# Altium PCB FRONT-UNIT.PcbDoc (part 1 of 2)
Units mm, origin at the board's own origin, x right, y up, seen from the top; angles counter-clockwise.
Board outline 187.14 x 77.14 mm, 2 copper layers (Top Layer, Top, Bottom Layer, Bottom); 94 components, 75 nets, 400 pads, 116 vias.
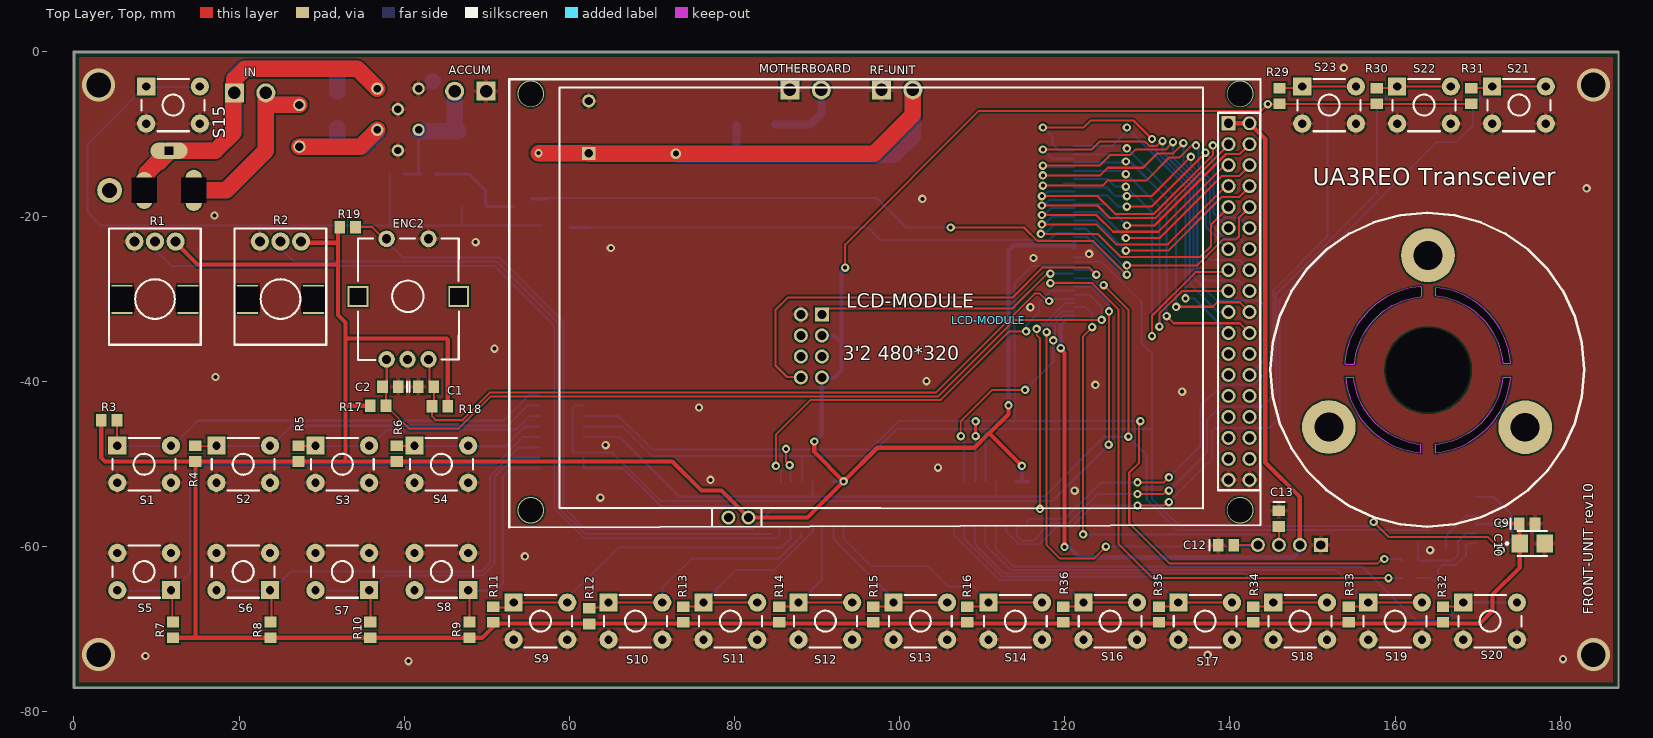
[diagram p0: Top Layer, Top view]
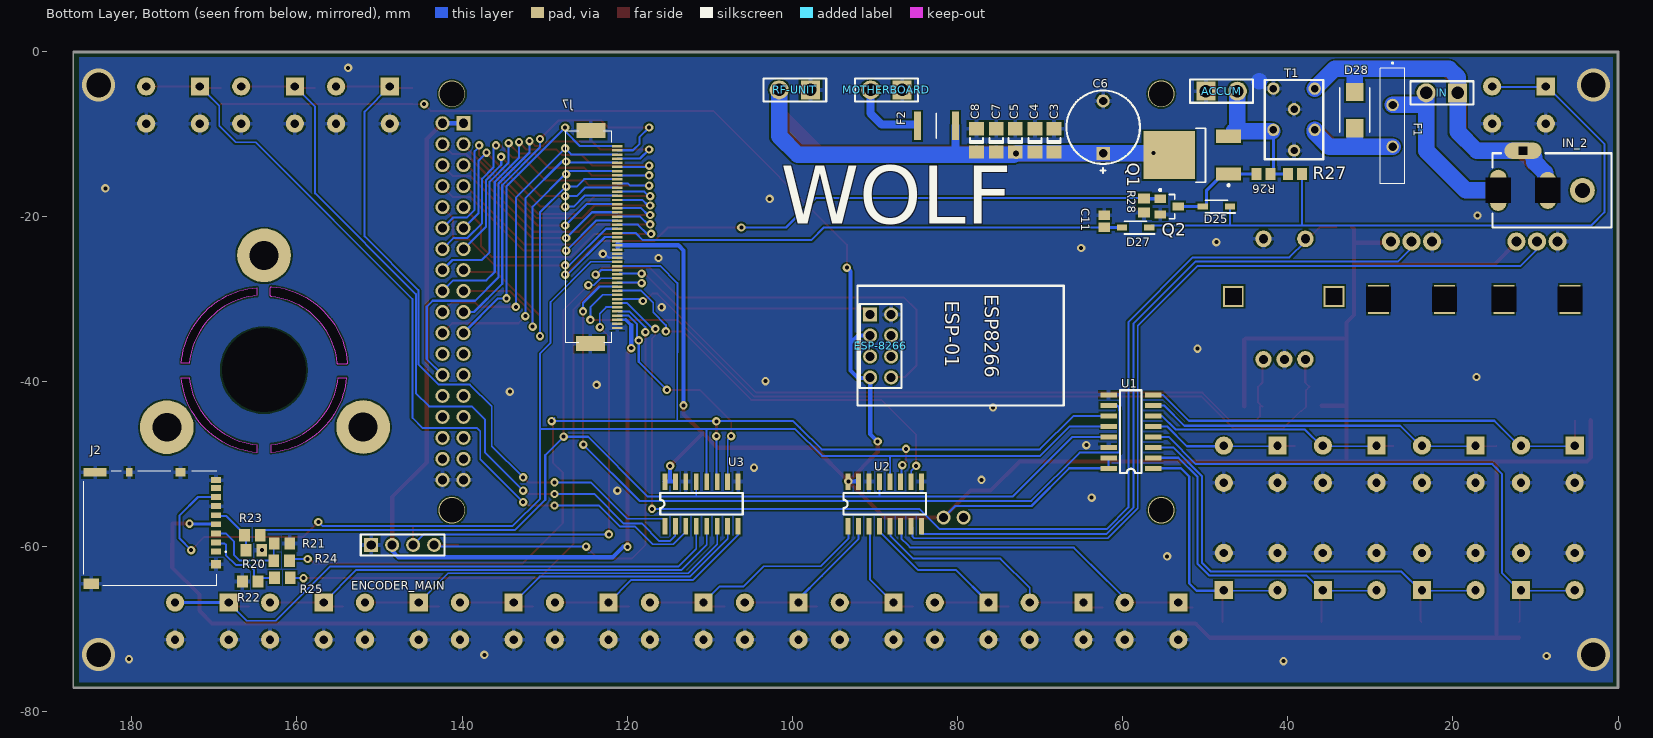
[diagram p1: Bottom Layer, Bottom view, seen from below]

## Layer stack, top to bottom
Top Solder, Top Mask: solder mask 0.0102, Solder Resist, Dk 3.5
Top Layer, Top: signal copper 0.0356
Dielectric 1: dielectric 0.32, FR-4, Dk 4.8
Bottom Layer, Bottom: signal copper 0.0356
Bottom Solder, Bot Mask: solder mask 0.0102, Solder Resist, Dk 3.5

## Board outline
-0.07,-77.07 ccw(c0,-77.07) 0,-77.141 ccw(c0,-77.07) 0.03,-77.134 ccw(c0,-77.07) 0.07,-77.07 0.07,-0.07 ccw(c0,-0.07) 0.03,-0.006 ccw(c0,-0.07) 0,0 187,0 cw(c187,-0.07) 187.07,-0.07 cw(c187,-0.07) 187.064,-0.1 cw(c187,-0.07) 187,-0.141 0,-0.141 cw(c0,-0.07) -0.064,-0.1 cw(c0,-0.07) -0.07,-0.07 cw(c0,-0.07) 0,0 0,-0.006 187,-0.006 cw(c187,-0.07) 187.064,-0.07 187.064,-77.07 ccw(c187,-77.07) 187,-77.006 0,-77.006 ccw(c0,-77.07) -0.064,-77.07 -0.064,-0.07 cw(c0,-0.07) 0,-0.006 cw(c0,-0.07) 0.064,-0.07 0.064,-77.07 cw(c0,-77.07) 0,-77.134 187,-77.134 ccw(c187,-77.07) 187.064,-77.07 187.07,-77.07 ccw(c187,-77.07) 187.064,-77.041 ccw(c187,-77.07) 187,-77 0,-77 ccw(c0,-77.07) -0.064,-77.041 ccw(c0,-77.07)
cut-out: 164.849,-29.564 cw(c164,-38.6) 173.034,-37.731 173.05,-37.75 174,-37.75 174.001,-37.752 ccw(c164,-38.6) 164.854,-28.6 164.85,-28.625
cut-out: 153.963,-37.844 ccw(c154.05,-37.75) 154.05,-37.878 154.975,-37.878 ccw(c154.975,-37.75) 155.102,-37.75 ccw(c154.975,-37.75) 155.102,-37.749 ccw(c154.977,-37.728) 155.104,-37.74 cw(c164,-38.6) 163.067,-29.711 ccw(c163.054,-29.584) 163.171,-29.634 ccw(c163.075,-29.55) 163.202,-29.55 163.202,-28.625 ccw(c163.075,-28.625) 163.131,-28.511 ccw(c163.054,-28.612) 163.042,-28.485 ccw(c164,-38.6) 153.879,-37.712 ccw(c154.005,-37.723)
cut-out: 154.004,-39.502 ccw(c164,-38.6) 163.094,-48.596 163.1,-48.575 163.1,-47.625 163.098,-47.616 cw(c164,-38.6) 154.985,-39.511 154.975,-39.5
cut-out: 164.864,-48.596 ccw(c164,-38.6) 173.993,-39.499 173.975,-39.5 173.025,-39.5 cw(c164,-38.6) 164.873,-47.628 164.85,-47.625

## Design rules (kind name [scope] priority, off if disabled: settings)
BoardOutlineClearance [All] p1: gap=0.2 ignorepadtopadclearanceinfootprint=FALSE except(0.4: Arc-SplitBarrior Arc-SplitContinuation Track-SplitBarrior Track-SplitContinuation SMDPad-SplitBarrior SMDPad-SplitContinuation THPad-SplitBarrior THPad-SplitContinuation Via-SplitBarrior Via-SplitContinuation Fill-SplitBarrior Fill-SplitContinuation Poly-SplitBarrior Poly-SplitContinuation Region-SplitBarrior Region-SplitContinuation Text-SplitBarrior Text-SplitContinuation)
Clearance "Clearance Bottom Layer" [OnLayer('Bottom Layer')] p1: gap=0.203 ignorepadtopadclearanceinfootprint=TRUE except(0.254: Arc-Text Track-Text SMDPad-Text THPad-Text Via-Text Fill-Text Poly-Text Region-Text Text-Text)
Clearance "Clearance Top Layer" [OnLayer('Top Layer')] p2: gap=0.203 ignorepadtopadclearanceinfootprint=TRUE except(0.254: Arc-Text Track-Text SMDPad-Text THPad-Text Via-Text Fill-Text Poly-Text Region-Text Text-Text)
Clearance [All] p3: gap=0.2 ignorepadtopadclearanceinfootprint=FALSE except(0.089: Arc-Arc Arc-Track Arc-SMDPad Track-Track Track-SMDPad SMDPad-SMDPad; 0.127: Arc-Via Track-Via SMDPad-Via THPad-Via Via-Via; 0.254: Arc-Text Track-Text SMDPad-Text THPad-Text Via-Text Fill-Text Poly-Text Region-Text Text-Text)
HoleSize [All] p1: absolutevalues=TRUE maxlimit=21 minlimit=0.486 maxpercent=80.000 minpercent=20.000
MinimumAnnularRing [All] p1: minimumring=0.076
MinimumSolderMaskSliver [All] p1: minsoldermaskwidth=0.01
PolygonConnect PolygonConnect_1 [All] p1: thpad.connectstyle=Relief thpad.reliefconductorwidth=0.508 thpad.reliefentries=4 thpad.polygonreliefangle="90 Angle" thpad.airgapwidth=0.254 smdpad.connectstyle=Relief smdpad.reliefconductorwidth=0.508 smdpad.reliefentries=4 smdpad.polygonreliefangle="90 Angle" smdpad.airgapwidth=0.254 via.connectstyle=Direct via.reliefconductorwidth=0.508 via.reliefentries=4 via.polygonreliefangle="90 Angle" via.airgapwidth=0.254
RoomDefinition FRONT-UNIT [InComponentClass('FRONT-UNIT')] p1: confinementstyle=ConfineIn formatcopy=TRUE lockcomponents=FALSE outline 0,-77.141 187,-77.141 187,-0.07 0,-0.07
RoutingCorners [All] p1: cornerstyle=Round minsetback=2.54 maxsetback=2.54
RoutingVias [All] p1: holewidth=0.5 width=1 viastyle="Through Hole" minholewidth=0.2 minwidth=0.45 maxholewidth=1 maxwidth=2
SilkToSilkClearance [All] p1: silktosilkclearance=0.01
SilkToSolderMaskClearance [IsPad] p1: minsilkscreentomaskgap=0.1 clearancetoexposedcopper=TRUE
SolderMaskExpansion [All] p1: expansion=0.102
Width [All] p1: maxlimit=2.54 minlimit=0.089 preferedwidth=0.381
25 further rules are at their usual default settings.

## Components (designator, comment, footprint, x,y, rotation, side; value= is the part's Value field where it differs from the comment)
ACCUM "JX2" JX2 48.006,-4.826 r180 bottom value=13.8V
C1 "100n" CAP_0805 42.431,-40.618 r0 top
C2 "100n" CAP_0805 38.531,-40.618 r180 top
C3 "1uF" CAP_1206 68.3,-10.77 r90 bottom
C4 "100n" CAP_1206 70.6,-10.77 r90 bottom
C5 "1n" CAP_1206 73,-10.77 r90 bottom
C6 "1000uF" CAP250RP 62.357,-9.722 r90 bottom
C7 "470pF" CAP_1206 75.3,-10.77 r90 bottom
C8 "120pF" CAP_1206 77.7,-10.77 r90 bottom
C9 "100n" CAP_0805 175.8,-57.2 r0 top
C10 "22uF" EEEFC_sizeB 176.2,-59.6 r0 top
C11 "8.2n" CAPC2013X94X50LL20T25 62.23,-20.574 r270 bottom
C12 "10n" CAP_0805 139.319,-59.817 r0 top
C13 "10n" CAP_0805 145.923,-56.388 r270 top
D25 "1n4148w" SOD3716X135N 48.641,-18.796 r0 bottom
D27 "1n4148w" SOD3716X135N 58.42,-21.336 r0 bottom
D28 "SM6T15A" SMBJ36CATR 31.877,-7.112 r90 bottom
ENC2 "PEC12" PEC12 40.5,-30 r180 top
ENCODER_MAIN "OPTICAL ENCODER" 644456-4 147.19,-59.135 r180 bottom
ESP-8266 "ESP-01 ESP8266" "ESP-01 ESP8266" 79.629,-35.63 r270 bottom
F1 "RUEF400" RUEF400 27.305,-9.017 r270 bottom
F2 "MF-MSMF110_16-2" FUSC4632X85N 82.55,-9.017 r0 bottom
IN "JX2" JX2 21.336,-5.023 r0 bottom value=13.8V
IN_2 "PJ-050B" PJ-050B 8.159,-16.184 r0 bottom value=13.8V
J2 "DM3AT-SF-PEJM5" DM3ATSFPEJM5 177.2,-57.8 r270 bottom
J7 "FPC-45P-0.5mm" FH12S45S05SH60 121.86,-22.5 r90 bottom
LCD-MODULE "ILI9481 480*320 3'2" LCD-MODULE-3.2-480-320 53.721,-3.37 r0 top
MOTHERBOARD "JX2" JX2 88.605,-4.67 r0 bottom value=13.8V
Q1 "IRFR9024NPBF" ONSC-DPAK-3-369C-01_V 51.562,-12.573 r0 bottom
Q2 "BSS123" FAIR-SOT23-3_V 54.356,-18.796 r270 bottom
R1 "ptv09a-4225f-b102" PTV09 9.8,-28.5 r180 top value="AF GAIN 1k"
R2 "ptv09a-4225f-b102" PTV09 25,-28.5 r180 top value="SHIFT 1k"
R3 "4.7k" RES_0805 4.25,-44.67 r180 top
R4 "4.7k" RES_0805 14.7,-48.72 r270 top
R5 "4.7k" RES_0805 27.2,-48.72 r270 top
R6 "4.7k" RES_0805 39.1,-48.72 r270 top
R7 "4.7k" RES_0805 12,-70.07 r270 top
R8 "4.7k" RES_0805 23.8,-70.07 r270 top
R9 "4.7k" RES_0805 47.9,-70.07 r270 top
R10 "4.7k" RES_0805 35.9,-70.07 r270 top
R11 "4.7k" RES_0805 50.8,-68.2 r270 top
R12 "4.7k" RES_0805 62.4,-68.4 r270 top
R13 "4.7k" RES_0805 73.8,-68.2 r270 top
R14 "4.7k" RES_0805 85.4,-68.2 r270 top
R15 "4.7k" RES_0805 96.8,-68.2 r270 top
R16 "4.7k" RES_0805 108.2,-68.2 r270 top
R17 "4.7k" RES_0805 36.831,-42.918 r180 top
R18 "4.7k" RES_0805 44.323,-42.996 r0 top
R19 "4.7k" RES_0805 33.147,-21.279 r180 top
R20 "3.3k" RES_0805 165.2,-60.4 r0 bottom
R21 "3.3k" RES_0805 161.8,-59.6 r0 bottom
R22 "3.3k" RES_0805 165.65,-64.2 r180 bottom
R23 "0" RES_0805 165.4,-58.6 r180 bottom
R24 "0" RES_0805 161.85,-61.67 r180 bottom
R25 "0" RES_0805 161.75,-63.77 r180 bottom
R26 "30k" RESC2013X60X40NL20T25 42.926,-14.859 r180 bottom
R27 "30k" RESC2013X60X40NL20T25 39.116,-14.859 r0 bottom
R28 "30k" RESC2013X60X40NL20T25 57.404,-18.669 r90 bottom
R29 "4.7k" RES_0805 146,-5.4 r270 top
R30 "4.7k" RES_0805 157.8,-5.4 r270 top
R31 "4.7k" RES_0805 169.2,-5.4 r270 top
R32 "4.7k" RES_0805 165.8,-68.2 r270 top
R33 "4.7k" RES_0805 154.4,-68.2 r270 top
R34 "4.7k" RES_0805 142.8,-68.2 r270 top
R35 "4.7k" RES_0805 131.4,-68.2 r270 top
R36 "4.7k" RES_0805 119.8,-68.2 r270 top
RF-UNIT "JX2" JX2 99.7,-4.67 r0 bottom value=13.8V
S1 "PTS645SK50LFS" PTS645SK50LFS 8.5,-50 r0 top
S2 "PTS645SK50LFS" PTS645SK50LFS 20.5,-50 r0 top
S3 "PTS645SK50LFS" PTS645SK50LFS 32.5,-50 r0 top
S4 "PTS645SK50LFS" PTS645SK50LFS 44.5,-50 r0 top
S5 "PTS645SK50LFS" PTS645SK50LFS 8.5,-63 r180 top
S6 "PTS645SK50LFS" PTS645SK50LFS 20.5,-63 r180 top
S7 "PTS645SK50LFS" PTS645SK50LFS 32.5,-63 r180 top
S8 "PTS645SK50LFS" PTS645SK50LFS 44.5,-63 r180 top
S9 "PTS645SK50LFS" PTS645SK50LFS 56.5,-69 r0 top
S10 "PTS645SK50LFS" PTS645SK50LFS 68,-69 r0 top
S11 "PTS645SK50LFS" PTS645SK50LFS 79.5,-69 r0 top
S12 "PTS645SK50LFS" PTS645SK50LFS 91,-69 r0 top
S13 "PTS645SK50LFS" PTS645SK50LFS 102.5,-69 r0 top
S14 "PTS645SK50LFS" PTS645SK50LFS 114,-69 r0 top
S15 "PTS645SK50LFS" PTS645SK50LFS 12,-6.5 r0 top value=PWR
S16 "PTS645SK50LFS" PTS645SK50LFS 125.5,-69 r0 top
S17 "PTS645SK50LFS" PTS645SK50LFS 137,-69 r0 top
S18 "PTS645SK50LFS" PTS645SK50LFS 148.5,-69 r0 top
S19 "PTS645SK50LFS" PTS645SK50LFS 160,-69 r0 top
S20 "PTS645SK50LFS" PTS645SK50LFS 171.5,-69 r0 top
S21 "PTS645SK50LFS" PTS645SK50LFS 175,-6.5 r0 top
S22 "PTS645SK50LFS" PTS645SK50LFS 163.5,-6.5 r0 top
S23 "PTS645SK50LFS" PTS645SK50LFS 152,-6.5 r0 top
T1 "BNX016-01" TRANSF_ICORE 39.243,-8.255 r270 bottom
U1 "MCP3008-I/SL" MCP3008-I/SL 59,-46.044 r0 bottom
U2 "MCP3008-I/SL" MCP3008-I/SL 88.8,-54.8 r90 bottom
U3 "MCP3008-I/SL" MCP3008-I/SL 111,-54.8 r90 bottom

## Footprints (in the part's own frame and the unit in brackets; to place one, negate y for a bottom-side part, rotate by r counter-clockwise, add the part's x,y. Pads: shape width x height; smd on the part's side, far side on the other; paste and mask are expansions set on the pad)
644456-4 [mm]
  rect 1.7x1.7 hole 1.1: 1(-3.81,-0.635)
  round 1.7 hole 1.1: 2(-1.27,-0.635) 3(1.27,-0.635) 4(3.81,-0.635)
  silkscreen extent -5.08,-1.9 5.08,0.64
CAP250RP [mm]
  rect 1.6x1.6 hole 1: 1(-2.631,0)
  round 1.6 hole 1: 2(3.719,0)
  silkscreen extent -4.99,-4.45 4.99,4.45
CAP_0805 [mm]
  rect 1.3x1.5 smd: 1(-0.75,0) 2(1.15,0)
  silkscreen extent -1.8,-0.65 -1.8,0.65
CAP_1206 [mm]
  rect 1.6x1.8 smd: 1(-1.4,0) 2(1.4,0)
  silkscreen extent -0.3,-0.8 0.3,0.8
CAPC2013X94X50LL20T25 [mm] "Chip Capacitor, 2-Leads, Body 2.01x1.25mm, IPC High Density"
  rect 1.15x1.35 smd: 1(-0.725,0) 2(0.725,0)
  body extent -1.1,-0.72 1.1,0.72, height 0.94
DM3ATSFPEJM5 [mm]
  rect 0.7x1.2 smd: 1(2.775,7.412) 2(1.675,7.412) 3(0.575,7.412) 4(-0.525,7.412) 5(-1.625,7.412) 6(-2.725,7.412) 7(-3.825,7.412) 8(-4.925,7.412) MP2(-5.875,7.412)
  rect 1x1.2 smd: MP1(4.325,7.412) MP3(-6.825,3.112)
  rect 1x0.8 smd: MP4(-6.825,-3.087)
  rect 1x2.8 smd: MP5(-6.825,-7.237)
  rect 1.3x1.9 smd: MP6(6.675,-7.688)
  silkscreen extent -6.93,-8.64 6.93,8.64, body extent -7.24,-8.64 7.2,7.94, height 1.93
EEEFC_sizeB [mm]
  rect 2x2.2 smd: 1(-1.1,0) 2(1.9,0)
  silkscreen extent -2.9,-1.5 2.2,1.5
"ESP-01 ESP8266" [mm]
  round 1.7 hole 1.1: 1(-3.76,-8.4) 2(-1.22,-8.4) 3(1.32,-8.4) 4(3.86,-8.4) 6(-1.22,-10.94) 7(1.32,-10.94) 8(3.86,-10.94)
  rect 1.7x1.7 hole 1.1: 5(-3.76,-10.94)
  silkscreen extent -7.25,-12.5 7.25,12.5
FAIR-SOT23-3_V [mm] "SOT23, 3-Leads, Body 2.92x1.3mm, Pitch 0.95mm"
  rect 1x1.4 smd: 1(-0.95,-1.1) 2(0.95,-1.1) 3(0,1.1)
  silkscreen extent -2.12,-1.23 1.46,0.65, body extent -1.46,-0.65 1.46,0.65, height 1.2
FH12S45S05SH60 [mm]
  rect 0.3x1.3 smd: 1(11,-0.65) 2(10.5,-0.65) 3(10,-0.65) 4(9.5,-0.65) 5(9,-0.65) 6(8.5,-0.65) 7(8,-0.65) 8(7.5,-0.65) 9(7,-0.65) 10(6.5,-0.65) 11(6,-0.65) 12(5.5,-0.65) 13(5,-0.65) 14(4.5,-0.65) 15(4,-0.65) 16(3.5,-0.65) 17(3,-0.65) 18(2.5,-0.65) 19(2,-0.65) 20(1.5,-0.65) 21(1,-0.65) 22(0.5,-0.65) 23(0,-0.65) 24(-0.5,-0.65) 25(-1,-0.65) 26(-1.5,-0.65) 27(-2,-0.65) 28(-2.5,-0.65) 29(-3,-0.65) 30(-3.5,-0.65) 31(-4,-0.65) 32(-4.5,-0.65) 33(-5,-0.65) 34(-5.5,-0.65) 35(-6,-0.65) 36(-6.5,-0.65) 37(-7,-0.65) 38(-7.5,-0.65) 39(-8,-0.65) 40(-8.5,-0.65) 41(-9,-0.65) 42(-9.5,-0.65) 43(-10,-0.65) 44(-10.5,-0.65) 45(-11,-0.65)
  rect 1.8x3.5 smd: 46(-12.9,2.6) 47(12.9,2.54)
  silkscreen extent -12.8,0 12.8,5.6, body extent -13.62,-5.6 13.62,1.27, height 2.1
FUSC4632X85N [mm]
  rect 0.85x3.43 smd: 1(-2.3,0) 2(2.3,0)
  silkscreen extent 0,-1.52 0,1.52, body extent -2.27,-1.62 2.27,1.62, height 0.85
JX2 [mm]
  rect 2.3x2.3 hole 1.5: 1(-1.905,0)
  round 2.3 hole 1.5: 2(1.905,0)
  silkscreen extent -3.81,-1.4 3.81,1.4
LCD-MODULE-3.2-480-320 [mm]
  rect 1.7x1.7 hole 1.1: 1(86.106,-5.334)
  round 1.7 hole 1.1: 2(88.646,-5.334) 3(86.106,-7.874) 4(88.646,-7.874) 5(86.106,-10.414) 6(88.646,-10.414) 7(86.106,-12.954) 8(88.646,-12.954) 9(86.106,-15.494) 10(88.646,-15.494) 11(86.106,-18.034) 12(88.646,-18.034) 13(86.106,-20.574) 14(88.646,-20.574) 15(86.106,-23.114) 16(88.646,-23.114) 17(86.106,-25.654) 18(88.646,-25.654) 19(86.106,-28.194) 20(88.646,-28.194) 21(86.106,-30.734) 22(88.646,-30.734) 23(86.106,-33.274) 24(88.646,-33.274) 25(86.106,-35.814) 26(88.646,-35.814) 27(86.106,-38.354) 28(88.646,-38.354) 29(86.106,-40.894) 30(88.646,-40.894) 31(86.106,-43.434) 32(88.646,-43.434) 33(86.106,-45.974) 34(88.646,-45.974) 35(86.106,-48.514) 36(88.646,-48.514) 37(25.54,-53.086) 38(27.956,-53.086)
  silkscreen extent -1,-54.3 90,0
MCP3008-I/SL [mm]
  rect 2x0.6 smd: 1(-2.7,4.445) 2(-2.7,3.175) 3(-2.7,1.905) 4(-2.7,0.635) 5(-2.7,-0.635) 6(-2.7,-1.905) 7(-2.7,-3.175) 8(-2.7,-4.445) 9(2.7,-4.445) 10(2.7,-3.175) 11(2.7,-1.905) 12(2.7,-0.635) 13(2.7,0.635) 14(2.7,1.905) 15(2.7,3.175) 16(2.7,4.445)
  silkscreen extent -1.3,-5 1.3,5
ONSC-DPAK-3-369C-01_V [mm] "DPAK, 3-Leads, Body 6.54x6.095mm, Pitch 2.29mm"
  rect 3x1.6 smd: 1(-4.4,2.29) 3(-4.4,-2.29)
  rect 6.2x5.8 smd: 4(2.8,0)
  silkscreen extent -4.52,-3.27 -0.45,3.76, body extent -1.6,-3.27 4.49,3.27, height 2.38
PEC12 [mm]
  round 2 hole 1.1: 1(-2.44,-7.302) 2(2.64,-7.302) 3(2.64,7.302) 4(0.1,7.302) 5(-2.44,7.302)
  rect 2.5x2.5 hole 2 square: 6(-6.1,-0.318) 7(6.1,-0.317)
  silkscreen extent -6.12,-7.32 6.12,7.38
PJ-050B [mm]
  oval 2x5 hole 3 square: 1(6.35,0.65)
  oval 2x4.5 hole 3 square: 2(0.35,0.65)
  oval 4.5x2 hole 1 square: 3(3.35,-4.15)
  round 3 hole 1.8: 4(-3.85,0.65)
  silkscreen extent -7.35,-3.85 7.05,5.15
PTS645SK50LFS [mm]
  rect 2.2x2.2 hole 1: 1(-3.25,2.25)
  round 2.2 hole 1: 2(3.25,2.25) 3(3.25,-2.25) 4(-3.25,-2.25)
  silkscreen extent -3.81,-3.17 3.81,3.18
PTV09 [mm]
  round 2.2 hole 1.2: 1(-2.515,-5.465) 2(-0.015,-5.465) 3(2.485,-5.465)
  rect 2.5x3.5 hole 3 square: 4(-4.015,1.535) 5(3.985,1.535)
  silkscreen extent -5.56,-7.03 5.56,7.03
RES_0805 [mm]
  rect 1.3x1.5 smd: 1(-0.95,0) 2(0.95,0)
RESC2013X60X40NL20T25 [mm] "Chip Resistor, 2-Leads, Body 2.00x1.25mm, IPC Medium Density"
  rect 1.2x1.45 smd: 1(-0.85,0) 2(0.85,0)
  body extent -1.1,-0.72 1.1,0.72, height 0.6
RUEF400 [mm]
  round 1.515 hole 1.01: 1(-2.525,0) 2(2.525,0)
  silkscreen extent -7.7,-1.5 7,1.5, body extent -7,-1.5 7,1.5, height 19.1
SMBJ36CATR [mm]
  rect 2.2x2.15 smd: 1(-2.2,0) 2(2.2,0)
  silkscreen extent -2.68,-1.81 2.68,1.81, body extent -3.09,-1.81 3.09,1.81, height 2.75
SOD3716X135N [mm]
  rect 1.25x0.75 smd: 1(-1.65,0) 2(1.65,0)
  silkscreen extent -2.27,-0.77 1.35,0.77, body extent -1.85,-0.78 1.85,0.77, height 1.35
TRANSF_ICORE [mm]
  round 1.5 hole 0.9: LCG1(-1.25,0.01) LCG2(3.75,0.01) LCG3(-3.75,-2.49) LCP(1.25,-2.49) P(1.25,2.51) PSG(-3.75,2.51)
  silkscreen extent -4.81,-3.54 4.81,3.54

## Part data
C1 C2 C9 C12 C13: library part CAP_0805, "CAP_0805"
C3 C4 C5 C7 C8: library part CAP_1206, "CAP_1206"
C6: library part CAP250RP, "CAP250RP"
C10: library part EEEFC_sizeB, "EEEFC_sizeB"
C11: library part CMP-2007-04444-1, "CAP_1206", Manufacturer="AVX Interconnect / Elco", Part Number=08055C822KAT2A
D25 D27: "Diode", Manufacturer_Name=Vishay, Datasheet Link=http://www.vishay.com/docs/85748/1n4148w.pdf, Height=1.35mm, Manufacturer_Part_Number=1n4148w
D28: "Diode", Manufacturer_Name=STMicroelectronics, Mouser Part Number=511-SM6T15A, RS Part Number=4864915P, Allied_Number=70390432, Allied Price/Stock=http://www.alliedelec.com/stmicroelectronics-sm6t15a/70390432/, Datasheet Link=http://www.st.com/web/en/resource/technical/document/datasheet/CD00000725.pdf, Height=2.65mm, Manufacturer_Part_Number=SM6T15A, Mouser Price/Stock=https://www.mouser.com/Search/Refine.aspx?Keyword=511-SM6T15A, RS Price/Stock=http://uk.rs-online.com/web/p/products/4864915P
ENCODER_MAIN: library part 644456-4
F1: "Fuse", Manufacturer_Name=LITTELFUSE, Mouser Part Number=650-RUEF400, RS Part Number=5176837P, Datasheet Link=https://componentsearchengine.com/Datasheets/1/RUEF400.pdf, Height=19mm, Manufacturer_Part_Number=RUEF400, Mouser Price/Stock=https://www.mouser.co.uk/ProductDetail/Littelfuse/RUEF400?qs=hv6pn79dJPQHuFVnpNF%2FDg%3D%3D, RS Price/Stock=http://uk.rs-online.com/web/p/products/5176837P
F2: "Fuse", Manufacturer_Name=Bourns, Manufacturer_Part_Number=MF-MSMF110/16-2, Mouser Part Number=652-MF-MSMF110/16-2, RS Part Number=6478207P, Allied_Number=70153434, Allied Price/Stock=https://www.alliedelec.com/bourns-mf-msmf110-16-2/70153434/, Datasheet Link=https://componentsearchengine.com/Datasheets/2/MF-MSMF110_16-2.pdf, Height=0.85mm, Mouser Price/Stock=https://www.mouser.co.uk/ProductDetail/Bourns/MF-MSMF110-16-2?qs=wksszfECgvir54ST3ixUHA%3D%3D, RS Price/Stock=http://uk.rs-online.com/web/p/products/6478207P
J2: "Connector", Manufacturer_Name=HRS(Hirose), Datasheet Link=https://datasheet.lcsc.com/szlcsc/Hirose-HRS-DM3AT-SF-PEJM5_C114218.pdf, Height=1.83mm, Manufacturer_Part_Number=DM3AT-SF-PEJM5
J7: library part FH12S-45S-0.5SH_55_, "Connector", Manufacturer_Name=Hirose, Manufacturer_Part_Number=FH12S-45S-0.5SH(55), Mouser Part Number=798-FH12S-45S-05SH55, RS Part Number=1620942, Datasheet Link=https://www.hirose.com/product/en/download_file/key_name/FH12S-45S-0.5SH%2855%29/category/Drawing%20(2D)/doc_file_id/43881/?file_category_id=6&item_id=05860665055&is_series=, Height=2mm, Mouser Price/Stock=https://www.mouser.co.uk/ProductDetail/Hirose-Connector/FH12S-45S-05SH55?qs=0N%252BVULUZFj%252BE0LA99Ny0NA%3D%3D, RS Price/Stock=http://uk.rs-online.com/web/p/products/1620942
LCD-MODULE: library part LCD-MODULE_3'2_480х320, "LCD-MODULE_3'2_480х320"
Q1: library part CMP-1058-00387-1, "IRFR9024NPBF, Транзистор, Р-канал 55В 11А", Manufacturer="On Semiconductor", Package Type="DPAK-3, IPAK-4", PartNumber=NTD2955G, Channel Polarity="P Channel", Ciss Typ (pF)=500, ComponentLink1Description="Manufacturer URL", ComponentLink1URL=http://www.onsemi.com/, ComponentLink2Description=Datasheet, ComponentLink2URL=http://www.onsemi.cn/pub_link/Collateral/NTD2955-D.PDF, ComponentLink3Description="Package Specification", ComponentLink3URL=http://www.onsemi.cn/pub_link/Collateral/369C.PDF, Configuration=Single, Coss Typ (pF)=150, Crss Typ (pF)=50, DatasheetVersion="Rev. 13", ID Max (A)=12, Mounting Technology="Surface Mount", PackageDescription="3-Pin Flange Mount, Body 6.54 x 6.095 mm, Pitch 2.29 mm", PackageReference=DPAK-3-369C-01, PackageVersion="Rev. E, 02/2014", Packing="Tape and Reel", PD Max (W)=55, Qrr Typ (nC)=100, RoHS=Pb-Free, V(BR)DSS Min (V)=60, VGS(th) Max (V)=4, VGS Max (V)=20
Q2: library part CMP-2000-04934-1, "N-Channel Logic Level Enhancement Mode Field Effect Transistor, 1.7 V, -55 to 150 degC, 3-Pin SOT-23, RoHS, Tape and Reel", Manufacturer=Fairchild, Maximum Continuous Drain Current=0.17A, Maximum Drain Source Voltage=100V, Maximum Gate Source Voltage=±20V, Operating Temperature=-55to150degC, Package=3SOT-23, Package Description="3-Pin Small Outline Transistor, Body 2.92 x 1.325 mm, Pitch 0.95 mm", Package Reference=SOT23-3, Package Version="Rev. 12, 03/2016", Category=MOSFET, Channel Mode=Enhancement, Channel Type=N, Datasheet URL=https://www.fairchildsemi.com/datasheets/BS/BSS123.pdf, Datasheet Version=Jun-03, Manufacturer URL=https://www.fairchildsemi.com/, Mounting=SurfaceMount, Package URL=http://www.fairchildsemi.com/dwg/MA/MA03D.pdf, Packaging=Tape&Reel, Rad Hard=No, RDS-on=6000@10VmOhm, Typical Fall Time=2.4ns, Typical Rise Time=9ns, Typical Turn-Off Delay Time=17ns, Typical Turn-On Delay Time=1.7ns
R1 R2: library part PTV09, "Adjustable Resistor PTV09"
R3 R4 R5 R6 R7 R8 R9 R10 R11 R12 R13 R14 R15 R16 R17 R18 R19 R20 R21 R22 R23 R24 R25 R29 R30 R31 R32 R33 R34 R35 R36: library part RES_0805, "RES_0805"
R26 R27 R28: library part CMP-2001-00626-1, "RES_0805", Manufacturer=Panasonic, Part Number=ERA-6AEB303V
S1: LCSC Part #=test
T1: library part TRANSF_ICORE
ENC2: FULLNAME="Выключатель замыкающий с приводом нажатием кнопки"

## Free pads (board coordinates)
  round 6.5 hole 3.5: 2(151.975,-45.5) 2(163.975,-24.7) 2(175.75,-45.525)
  round 0.1 hole 10.2: 4(164,-38.6)

## Via types
v1: diameter 1.016, hole 0.486, Top Layer, Top to Bottom Layer, Bottom, tented both sides, 107 vias
v2: diameter 3.2, hole 3, Top Layer, Top to Bottom Layer, Bottom, 4 vias
v3: diameter 4, hole 3, Top Layer, Top to Bottom Layer, Bottom, 4 vias
v4: diameter 1.27, hole 0.711, Top Layer, Top to Bottom Layer, Bottom, tented both sides, 1 vias

## Nets (pads, with @x,y where several pads share a name; then routed paths per layer and width w, separated by ;. In a path a pad name is that pad's centre, name@x,y a point inside that pad or via, vN(x,y) a via of type N, cw(c..) or ccw(c..) an arc to the next point about the centre after c; other vN are vias at no path point)
+3V3: C9.1 C10.1 ESP-8266.6 ESP-8266.8 J2.4 J7.24 J7.25 J7.26 LCD-MODULE.38 R1.1 R2.1 R3.2 R4.2 R5.2 R6.2 R7.2 R8.2 R9.2 R10.2 R11.2 R12.2 R13.2 R14.2 R15.2 R16.2 R17.2 R18.2 R19.2 R29.2 R30.2 R31.2 R32.2 R33.2 R34.2 R35.2 R36.2 U1.15 U1.16 U2.15 U2.16 U3.15 U3.16 | length 580.6
  Top Layer, Top w0.23: v1(93.4,-26.2) 93.4,-23.4 109.6,-7.2 143.8,-7.2 v1(144.6,-6.4) 145.95,-6.4 R29.2 R30.2 R31.2
  Top Layer, Top w0.5: R3.2 3.3,-49.21 3.76,-49.67 R4.2 ; R7.2 14.7,-71.02 R4.2 ; R1.1@12.281,-23.118 14.986,-25.823 31.973,-25.823 32,-25.796 ; 14.721,-71.02 R8.2 R10.2 R9.2 49.4,-71.02 51.15,-69.27 170.27,-69.27 171.8,-67.741 171.8,-65.8 175.1,-62.5 C10.1 175.05,-59.55 C9.1 v1(173,-57.2) ; R2.1@27.1,-23.184 32,-23.184 ; R19.2 32,-21.476 32,-23.184 ; 32.905,-49.665 32.905,-42.918 ; R17.2 32.906,-42.918 ; R18.2 45.273,-34.927 45.124,-34.778 32.893,-34.778 ; v1(89.662,-47.244) 89.662,-48.514 v1(93.218,-52.07) ; v1(113.173,-42.868) 113.173,-43.947 110.895,-46.226 110.826,-46.226 ; v1(114.8,-50.2) 110.826,-46.226 ; R4.2 R5.2 R6.2 72.46,-49.67 75.99,-53.2 78.421,-53.2 LCD-MODULE.38 88.832,-56.456 v1(93.218,-52.07) ; 32,-25.796 32,-23.184 ; 32,-25.796 32,-31.943 32.893,-32.836 32.893,-34.778 ; 32.893,-34.778 32.893,-40.33 32.905,-40.33 32.905,-42.918 ; v1(93.218,-52.07) 97.288,-48 109.052,-48 110.826,-46.226
  Bottom Layer, Bottom w0.254: U1.15 U1.16 66.464,-50.489 71.04,-55.066 80.287,-55.066 LCD-MODULE.38
  Bottom Layer, Bottom w0.381: J2.4 169.84,-57.223 172.977,-57.223 v1(173,-57.2)
  Bottom Layer, Bottom w0.5: v1(89.662,-47.244) 90.569,-46.337 90.569,-39.803 90.805,-39.567 92.046,-39.567 92.964,-38.65 92.964,-35.328 ; ESP-8266.6@90.805,-34.41 92.046,-34.41 92.964,-35.328 ; U2.15@91.975,-52.037 92.329,-52.037 92.362,-52.07 v1(93.218,-52.07) ; v1(93.4,-26.2) 92.964,-26.636 92.964,-35.328 ; v1(113.173,-42.868) 113.173,-24.114 113.808,-23.479 J7.25@121.143,-23.479 ; U3.15 114.81,-52.1 ; v1(114.8,-50.2) 114.8,-52.09 114.81,-52.1 ; U3.16 114.81,-52.1 ; 121.143,-23.749 J7.25@121.143,-23.479 ; 121.143,-23.241 J7.25@121.143,-23.479
+5: ENCODER_MAIN.2 J7.43 LCD-MODULE.1 LCD-MODULE.2 | length 117.7
  Top Layer, Top w0.5: v1(119.507,-35.941) 119.507,-36.081 119.965,-36.539 v1(119.965,-60) ; LCD-MODULE.1 LCD-MODULE.2@142.299,-8.704 ; LCD-MODULE.2@142.24,-8.646 LCD-MODULE.2@142.299,-8.704 ; LCD-MODULE.2@142.333,-8.739 LCD-MODULE.2@142.299,-8.704 ; LCD-MODULE.2 LCD-MODULE.2@142.299,-8.704 ; LCD-MODULE.2@142.46,-8.797 144.272,-10.609 144.272,-49.784 148.46,-53.972 ENCODER_MAIN.2
  Bottom Layer, Bottom w0.3: 120.164,-32.49 J7.43@121.132,-32.49
  Bottom Layer, Bottom w0.4: 119.507,-33.147 120.164,-32.49
  Bottom Layer, Bottom w0.5: v1(119.507,-35.941) 119.507,-33.147 ; v1(119.965,-60) 120.509,-60 121.779,-61.27 147.7,-61.27 148.5,-60.47 148.5,-60.431 148.46,-60.391 ENCODER_MAIN.2 ; LCD-MODULE.1 LCD-MODULE.2
+12: C3.1 C4.1 C5.1 C6.1 C7.1 C8.1 F2.1 Q1.4 RF-UNIT.2 | length 107.2
  Top Layer, Top w2: v1(56.261,-12.319) 62.322,-12.319 C6.1 62.374,-12.37 v4(72.9,-12.37) 96.92,-12.37 101.605,-7.685 RF-UNIT.2
  Bottom Layer, Bottom w0.254: C5.1@72.817,-12.354 C5.1
  Bottom Layer, Bottom w0.381: 80.137,-12.52 80.25,-12.407 ; 85.965,-12.135 86.35,-12.52
  Bottom Layer, Bottom w1: 80.25,-12.407 F2.1
  Bottom Layer, Bottom w1.6: C7.1@75.3,-12.52 C7.1 ; C8.1 C8.1@77.807,-12.52
  Bottom Layer, Bottom w2: v1(56.261,-12.319) 62.322,-12.319 C6.1 68.3,-12.354 70.6,-12.354 C5.1@72.817,-12.354 ; v4(72.9,-12.37) 73.188,-12.52 75.3,-12.52 77.807,-12.52 80.137,-12.52 86.35,-12.52 99.35,-12.52 101.605,-10.265 RF-UNIT.2
AD1_CS: J7.35 U1.10 | length 99.2
  Top Layer, Top w0.254: v1(125.308,-47.625) 125.329,-47.605 125.329,-31.516 v1(125.349,-31.496)
  Bottom Layer, Bottom w0.254: U1.10 60.673,-42.869 60.444,-43.098 60.444,-43.484 60.368,-43.56 60.368,-48.589 65.205,-48.589 71.047,-54.431 118.502,-54.431 v1(125.308,-47.625) ; J7.35@121.143,-28.479 122.443,-28.479 123.348,-28.479 125.349,-30.48 v1(125.349,-31.496)
AD2_CS: J7.36 U2.10 | length 50.8
  Top Layer, Top w0.23: v1(85.001,-50.2) 85.001,-46.444 89.245,-42.2 105,-42.2 113.291,-33.909 v1(115.316,-33.909)
  Bottom Layer, Bottom w0.23: v1@84.709,-50.292 84.801,-50.2 v1(85.001,-50.2) 85.604,-50.803 85.604,-52.079 U2.10 ; v1(115.316,-33.909) 115.316,-33.147 116.84,-31.623 116.84,-30.435 118.296,-28.979 J7.36@121.143,-28.979
AD3_CS: J7.42 U3.10 | length 29.1
  Top Layer, Top w0.23: v1(107.4,-46.6) 107.4,-44.8 111.2,-41 v1(115.2,-41)
  Bottom Layer, Bottom w0.23: v1(107.4,-46.6) 107.825,-47.025 U3.10
  Bottom Layer, Bottom w0.254: v1(115.2,-41) 118.6,-37.6 v1(118.6,-35) 118.8,-34.8 118.8,-33.042 119.863,-31.979 J7.42@121.143,-31.979
CLK: J7.33 R23.2 U1.13 U2.13 U3.13 | length 143.5
  Top Layer, Top w0.254: v1(124.714,-28.321) 127.696,-31.303 v1(127.696,-46.67)
  Bottom Layer, Bottom w0.23: 73.298,-53.915 88.519,-53.915 89.4,-53.915 ; U2.13 89.435,-53.88 89.4,-53.915 ; U3.13 111.635,-53.88 111.6,-53.915 ; J7.33@121.143,-27.479 123.192,-27.479 124.034,-28.321 v1(124.714,-28.321) ; 124.73,-46.67 117.485,-53.915 111.6,-53.915 ; 89.4,-53.915 111.6,-53.915
  Bottom Layer, Bottom w0.254: U1.13 66.062,-46.679 73.298,-53.915 ; 124.73,-46.67 v1(127.696,-46.67) 129.921,-48.895 129.921,-54.299 133.604,-57.982 R23.2@164.2,-57.982
CPU_PW_HOLD: J7.23 Q2.1 R28.2 | length 84.2
  Top Layer, Top w0.254: v1(106.172,-21.336) 115.062,-21.336 116.713,-22.987 123.444,-22.987 v1(127.508,-27.051)
  Bottom Layer, Bottom w0.254: R28.2@57.404,-17.762 97.194,-17.762 100.768,-21.336 v1(106.172,-21.336) ; J7.23@121.143,-22.479 122.682,-22.479 127.254,-27.051 v1(127.508,-27.051)
  Bottom Layer, Bottom w0.381: Q2.1 57.377,-17.846 R28.2
CPU_PW_ON: C11.2 D27.2 J7.22 | length 62.1
  Bottom Layer, Bottom w0.254: C11.2@62.23,-21.308 96.167,-21.308 97.72,-22.86 118.11,-22.86 118.991,-21.979 J7.22@121.143,-21.979
  Bottom Layer, Bottom w0.381: D27.2 62.193,-21.336 C11.2
E1A: C13.2 ENCODER_MAIN.3 J7.40 | length 56.2
  Top Layer, Top w0.23: v1(122.22,-58.49) 122.22,-34.498 v1(123.317,-33.401)
  Top Layer, Top w0.254: ENCODER_MAIN.3 145.92,-57.541 C13.2
  Bottom Layer, Bottom w0.23: J7.40@121.143,-30.979 122.546,-30.979 123.317,-31.75 v1(123.317,-33.401) ; v1(122.22,-58.49) 144.64,-58.49 ENCODER_MAIN.3
E1B: C12.2 ENCODER_MAIN.4 J7.41 | length 60.4
  Top Layer, Top w0.23: v1(117.8,-34) 117.8,-59.8 119.4,-61.4 123.545,-61.4 v1(124.96,-59.985)
  Top Layer, Top w0.254: C12.2 140.516,-59.77 ENCODER_MAIN.4
  Bottom Layer, Bottom w0.23: v1(117.8,-34) 117.8,-33.4 119.689,-31.511 121.111,-31.511 J7.41@121.143,-31.479 ; v1@124.975,-60 v1(124.96,-59.985) 124.945,-59.97 143.18,-59.97 ENCODER_MAIN.4
E2A: C2.2 ENC2.3 J7.37 R17.1 | length 105.5
  Top Layer, Top w0.23: ENC2.3@37,-37.57 37.881,-37.57 ENC2.3@38.065,-37.57 ; R17.1 37.781,-43.018 38.316,-43.553 38.416,-43.553 40.526,-45.663 46.609,-45.663 50.489,-41.784 104.647,-41.784 113.919,-32.512 v1(124.46,-32.512)
  Top Layer, Top w0.254: R17.1 37.781,-41.018 C2.2 37.881,-40.118 ENC2.3@37.881,-37.638
  Bottom Layer, Bottom w0.23: J7.37@121.143,-29.479 122.951,-29.479 124.46,-30.988 v1(124.46,-32.512)
E2B: C1.2 ENC2.5 J7.38 R18.1 | length 92.9
  Top Layer, Top w0.23: ENC2.5@42.58,-36.95 43.114,-37.485 ENC2.5@43.2,-37.57 ; R18.1 43.373,-44.205 43.815,-44.647 47.017,-44.647 50.341,-41.324 104.345,-41.324 116.332,-29.337 116.967,-29.337 117.856,-30.226 v1(118.11,-30.226) v1@117.983,-30.353
  Top Layer, Top w0.254: ENC2.5@42.961,-37.638 43.058,-37.735 43.058,-40.095 C1.2 43.581,-42.518 R18.1@43.081,-43.018
  Bottom Layer, Bottom w0.23: v1(118.11,-30.226) 118.323,-30.226 118.57,-29.979 J7.38@121.143,-29.979
E2S: ENC2.2 J7.39 R19.1 | length 140
  Top Layer, Top w0.23: v1(116.6,-33.6) 116.6,-34.4 117,-34.8 v1(117,-55.4)
  Top Layer, Top w0.254: R19.1 36.127,-21.279 ENC2.2@37.881,-23.033
  Bottom Layer, Bottom w0.23: ENC2.2@37.881,-23.033 39.81,-24.962 51.492,-24.962 59.309,-32.779 59.309,-55.216 61.948,-57.855 82.145,-57.855 84.6,-55.4 v1(117,-55.4) ; v1(116.6,-33.6) 116.895,-33.6 120.016,-30.479 J7.39@121.143,-30.479
GND: ACCUM.1 C1.1 C2.1 C3.2 C4.2 C5.2 C6.2 C7.2 C8.2 C9.2 C10.2 C11.1 C12.1 C13.1 ENC2.1 ENC2.4 ENCODER_MAIN.1 ESP-8266.1 J2.6 J2.MP1 J2.MP2 J2.MP3 J2.MP4 J2.MP5 J2.MP6 J7.27 J7.28 J7.44 J7.45 J7.46 J7.47 LCD-MODULE.35 LCD-MODULE.36 MOTHERBOARD.1 Q2.2 R1.3 R2.3 R20.1 R21.1 R22.1 R28.1 RF-UNIT.1 S1.3 S1.4 S2.3 S2.4 S3.3 S3.4 S4.3 S4.4 S5.3 S5.4 S6.3 S6.4 S7.3 S7.4 S8.3 S8.4 S9.3 S9.4 S10.3 S10.4 S11.3 S11.4 S12.3 S12.4 S13.3 S13.4 S14.3 S14.4 S15.3 S15.4 S16.3 S16.4 S17.3 S17.4 S18.3 S18.4 S19.3 S19.4 S20.3 S20.4 S21.3 S21.4 S22.3 S22.4 S23.3 S23.4 T1.LCG1 T1.LCG2 T1.LCG3 U1.9 U1.14 U2.9 U2.14 U3.9 U3.14 | length 2
  Bottom Layer, Bottom w0.23: J7.28@121.143,-24.979 122.255,-24.979 122.723,-24.511 v1(122.936,-24.511)
  Bottom Layer, Bottom w2: 43.429,-3.621 43.434,-3.626
  other v1: 40.513,-73.857 180.34,-73.603 8.636,-73.222 137.287,-73.095 54.61,-61.157 164.25,-60.4 63.754,-54.045 121.2,-53.2 77.089,-51.886 104.648,-50.419 64.389,-47.695 75.692,-43.123 134.2,-41.2 123.698,-40.386 103.251,-39.948 17.145,-39.44 50.927,-36.011 115.824,-30.988 116.205,-25.019 65.024,-23.819 48.641,-23.114 17.018,-19.882 102.743,-17.85 183.2,-16.6 153.8,-2
  other v3: 3,-73.07 184,-73.07 3,-4.07 184,-4.07
MISO: J2.7 J7.29 U1.12 U2.12 U3.12 | length 171
  Top Layer, Top w0.254: v1(157.4,-57) 159.2,-58.8 171.2,-58.8 v1(172.8,-60.4)
  Bottom Layer, Bottom w0.23: U1.12 66.401,-45.409 69.991,-49 88.2,-49 96.4,-49 99.68,-45.72 110.4,-45.72 ; U3.12 110.4,-52.065 110.4,-45.72 ; J7.29@121.143,-25.479 124.412,-25.479 129.286,-30.353 129.286,-35.306 130.556,-36.576 130.556,-45.72 ; v1(157.4,-57) 156.926,-57.474 133.858,-57.474 130.556,-54.172 130.556,-45.72 ; 110.4,-45.72 130.556,-45.72
  Bottom Layer, Bottom w0.254: U2.12 88.165,-49.035 88.2,-49 ; J2.7 171.975,-53.975 174.2,-56.2 174.2,-59 v1(172.8,-60.4)
MOSI: J7.30 R24.2 U1.11 U2.11 U3.11 | length 155.7
  Top Layer, Top w0.254: v1(86.233,-48.133) 86.233,-49.671 v1(86.669,-50.107) ; v1(129.159,-44.774) 129,-44.933 129,-49.8 127.8,-51 127.8,-57.131 132.715,-62.046 157.849,-62.046 158.425,-61.47 v1(158.7,-61.47)
  Top Layer, Top w0.381: v1(109.2,-46.6) v1(109.2,-44.8)
  Bottom Layer, Bottom w0.23: U1.11 65.939,-44.139 70.01,-48.21 96.46,-48.21 99.095,-45.575 99.896,-44.774 v1(129.159,-44.774) 128.778,-44.393 ; 113.935,-44.744 113.935,-36.482 113.919,-36.466 113.919,-28.067 116.007,-25.979 J7.30@121.143,-25.979
  Bottom Layer, Bottom w0.254: v1(86.669,-50.107) 86.782,-50.22 86.782,-51.987 U2.11 ; U3.11@109.2,-51.995 v1(109.2,-46.6) ; v1(158.7,-61.47) 160.7,-61.47 R24.2
NetD25_1: D25.1 D27.1 R27.1 S15.1 S15.2 | length 88.6
  Bottom Layer, Bottom w0.254: S15.2@15.061,-4.297 8.561,-4.297 1.651,-11.207 1.651,-19.501 3.232,-21.082 D27.1@56.516,-21.082 ; 38.266,-21.043 R27.1 ; 46.991,-21.081 D25.1
NetD25_2: D25.2 Q1.1 Q2.3 R26.1 | length 12.4
  Bottom Layer, Bottom w0.254: R26.1 R26.1@43.96,-15.043
  Bottom Layer, Bottom w0.381: R26.1 47.158,-14.859 Q1.1 47.862,-14.863 49.856,-16.858 49.856,-18.611 50.041,-18.796 D25.2 Q2.3
NetD28_1: D28.1 F1.2 T1.P | length 23
  Top Layer, Top w2: F1.2 34.696,-11.542 T1.P
  Bottom Layer, Bottom w2: F1.2 31.877,-11.542 ; D28.1 31.877,-11.542 ; T1.P 36.733,-9.808 34.999,-11.542 31.877,-11.542
NetD28_2: D28.2 IN.1 IN_2.2 IN_2.3 T1.PSG | length 83.8
  Top Layer, Top w2: IN_2.2 8.843,-16.834 8.843,-14.7 10.128,-13.415 10.316,-13.415 11.509,-12.222 IN_2.3 17.119,-12.034 19.304,-9.849 19.304,-5.277 19.431,-5.15 19.431,-3.372 20.701,-2.102 34.33,-2.102 T1.PSG
  Bottom Layer, Bottom w2: IN_2.2 8.843,-16.5 8.843,-14.7 10.128,-13.415 10.128,-12.841 10.935,-12.034 IN_2.3 17.119,-12.034 19.431,-9.722 19.431,-5.277 19.431,-3.118 20.447,-2.102 31.877,-2.102 ; D28.2 31.877,-2.102 ; T1.PSG 34.33,-2.102 31.877,-2.102
NetESP-8266_4: ESP-8266.4 J7.31 | length 54.7
  Top Layer, Top w0.254: ESP-8266.4 87.979,-39.44 86.36,-39.44 84.963,-38.043 84.963,-31.312 86.487,-29.788 113.722,-29.788 117.348,-26.162 122.936,-26.162 v1(123.825,-27.051)
  Bottom Layer, Bottom w0.254: J7.31@121.143,-26.479 122.443,-26.479 123.14,-26.479 123.712,-27.051 v1(123.825,-27.051)
NetESP-8266_5: ESP-8266.5 J7.32 | length 32.4
  Top Layer, Top w0.254: ESP-8266.5 91.292,-31.147 113.633,-31.147 117.856,-26.924 v1(118.237,-26.924)
  Bottom Layer, Bottom w0.254: v1(118.237,-26.924) J7.32@120.944,-26.924
NetF1_1: F1.1 IN.2 IN_2.1 | length 43.8
  Top Layer, Top w0.381: 23.241,-6.477 23.256,-6.492
  Top Layer, Top w2: IN_2.1 18.415,-16.834 23.241,-12.008 23.241,-6.477 IN.2 ; 23.256,-6.492 F1.1
  Bottom Layer, Bottom w0.381: 23.241,-6.604 23.353,-6.492
  Bottom Layer, Bottom w2: IN_2.1 18.415,-16.834 23.241,-12.008 23.241,-8.636 ; 23.241,-8.866 23.241,-8.636 ; IN.2 23.241,-6.604 23.241,-8.636 ; 23.353,-6.492 F1.1
NetF2_2: F2.2 MOTHERBOARD.2 | length 9.1
  Bottom Layer, Bottom w0.381: F2.2@84.822,-8.989 F2.2 ; MOTHERBOARD.2 MOTHERBOARD.2@90.537,-4.698
  Bottom Layer, Bottom w1: F2.2@84.925,-8.862 89.182,-8.862 90.537,-7.507 MOTHERBOARD.2@90.537,-4.698
NetJ2_2: J2.2 R22.2 R25.1 | length 10.5
  Bottom Layer, Bottom w0.23: R25.1 164.27,-63.77 R22.2 165.2,-63.7 165.2,-62.8 165.8,-62.2 167.4,-62.2 168.6,-61 168.6,-59.735 168.735,-59.6 169.663,-59.6 J2.2
NetJ2_3: J2.3 R21.2 R24.1 | length 11.4
  Bottom Layer, Bottom w0.23: R21.2 162.8,-59.65 R24.1 166.93,-61.67 167.6,-61 167.6,-59.4 168.625,-58.375 J2.3
NetJ2_5: J2.5 R20.2 R23.1 | length 6.4
  Bottom Layer, Bottom w0.23: R20.2 166.15,-58.8 R23.1
  Bottom Layer, Bottom w0.254: R23.1 166.35,-58.5 168.575,-56.275 169.688,-56.275 J2.5
NetJ7_1: J7.1 LCD-MODULE.21 | length 38.2
  Bottom Layer, Bottom w0.254: J7.1@121.143,-11.479 125.721,-11.479 127.508,-9.692 v1(127.508,-9.214) 134.62,-16.326 v1(134.62,-29.915) 135.638,-29.915 LCD-MODULE.21
NetJ7_2: J7.2 LCD-MODULE.19 | length 45.4
  Top Layer, Top w0.254: v1(117.348,-9.214) 122.287,-9.214 123.122,-8.379 128.324,-8.379 v1(130.556,-10.611)
  Bottom Layer, Bottom w0.254: v1(117.348,-9.214) 118.491,-10.357 118.491,-11.176 119.294,-11.979 J7.2@121.143,-11.979 ; v1(130.556,-10.611) 130.556,-11.62 135.128,-16.192 135.128,-28.137 138.555,-31.564 LCD-MODULE.19
NetJ7_3: J7.3 LCD-MODULE.20 | length 37.9
  Top Layer, Top w0.254: v1(133.477,-30.931) 137.922,-30.931 138.466,-30.387 141.19,-30.387 LCD-MODULE.20
  Bottom Layer, Bottom w0.254: J7.3@121.143,-12.479 122.443,-12.479 126.783,-12.479 v1(127.508,-11.754) 133.477,-17.723 v1(133.477,-30.931)
NetJ7_4: J7.4 LCD-MODULE.26 | length 57
  Top Layer, Top w0.254: v1(117.348,-11.881) 123.253,-11.881 124.215,-10.919 129.683,-10.919 130.21,-11.446 131.15,-11.446 131.529,-11.067 131.529,-10.912 131.483,-10.865 v1(131.826,-10.865)
  Bottom Layer, Bottom w0.254: v1(117.348,-11.881) 118.446,-12.979 J7.4@121.143,-12.979 ; v1(131.826,-10.865) 131.826,-12.248 135.582,-16.004 135.582,-27.375 138.408,-30.201 143.542,-30.201 144.272,-30.931 144.272,-37.279 LCD-MODULE.26
NetJ7_5: J7.5 LCD-MODULE.22 | length 38.5
  Top Layer, Top w0.254: v1(132.334,-32.074) 133.187,-32.927 141.19,-32.927 LCD-MODULE.22
  Bottom Layer, Bottom w0.254: J7.5@121.143,-13.479 122.443,-13.479 127.525,-13.479 v1(127.381,-13.335) 127.889,-13.335 132.334,-17.78 v1(132.334,-32.074)
NetJ7_6: J7.6 LCD-MODULE.18 | length 45.1
  Top Layer, Top w0.254: v1(117.348,-13.843) 124.206,-13.843 125.476,-12.573 127.87,-12.573 128.543,-11.9 132.188,-11.9 132.88,-11.209 132.88,-10.992 v1(133.096,-10.992)
  Bottom Layer, Bottom w0.254: v1(117.348,-13.843) 117.484,-13.979 J7.6@121.143,-13.979 ; v1(133.096,-10.992) 133.096,-12.876 136.036,-15.816 136.036,-26.719 137.051,-27.733 141.076,-27.733 LCD-MODULE.18
NetJ7_7: J7.7 LCD-MODULE.17 | length 37.9
  Top Layer, Top w0.254: v1(131.445,-33.344) 131.445,-31.783 134.203,-29.024 LCD-MODULE.17
  Bottom Layer, Bottom w0.254: J7.7@121.143,-14.479 122.443,-14.479 127.001,-14.479 v1(127.381,-14.859) 127.381,-14.732 131.445,-18.796 v1(131.445,-33.344)
NetJ7_8: J7.8 LCD-MODULE.16 | length 43.3
  Top Layer, Top w0.254: v1(117.348,-15.009) 124.31,-15.009 125.222,-14.097 129.475,-14.097 131.217,-12.354 133.131,-12.354 134.15,-11.336 134.15,-11.119 v1(134.366,-11.119)
  Bottom Layer, Bottom w0.254: v1(117.348,-15.009) 121.113,-15.009 J7.8@121.143,-14.979 ; v1(134.366,-11.119) 134.366,-13.504 136.652,-15.79 136.652,-24.327 137.592,-25.268 141.15,-25.268 LCD-MODULE.16
NetJ7_9: J7.9 LCD-MODULE.15 | length 40.1
  Top Layer, Top w0.254: v1(130.556,-34.487) 130.556,-32.029 135.845,-26.74 139.571,-26.74 LCD-MODULE.15
  Bottom Layer, Bottom w0.254: J7.9@121.143,-15.479 122.443,-15.479 125.207,-15.479 126.111,-16.383 v1(127.381,-16.383) 127.443,-16.383 130.556,-19.496 v1(130.556,-34.487)
NetJ7_10: J7.10 LCD-MODULE.14 | length 40.7
  Top Layer, Top w0.254: v1(117.348,-16.256) 124.587,-16.256 125.222,-15.621 129.902,-15.621 132.68,-12.843 133.912,-12.843 135.382,-11.373 v1(135.89,-11.373)
  Bottom Layer, Bottom w0.254: v1(117.348,-16.256) 119.634,-16.256 119.911,-15.979 J7.10@121.143,-15.979 ; v1(135.89,-11.373) 136.198,-11.681 136.198,-14.052 137.56,-15.414 137.56,-20.802 139.339,-22.581 141.004,-22.581 LCD-MODULE.14
NetJ7_11: J7.11 LCD-MODULE.13 | length 29.6
  Top Layer, Top w0.254: v1(127.508,-17.526) 130.499,-17.526 v1(135.255,-12.77)
  Bottom Layer, Bottom w0.254: J7.11@121.143,-16.479 122.443,-16.479 125.064,-16.479 126.111,-17.526 v1(127.508,-17.526) ; v1(135.255,-12.77) 135.255,-13.751 137.106,-15.602 137.106,-21.223 LCD-MODULE.13
NetJ7_12: J7.12 LCD-MODULE.12 | length 42.7
  Top Layer, Top w0.254: v1(117.221,-17.526) 123.952,-17.526 126.111,-19.685 130.797,-19.685 137.922,-12.56 v1(137.922,-11.373)
  Bottom Layer, Bottom w0.254: v1(117.221,-17.526) 117.384,-17.526 117.931,-16.979 J7.12@121.143,-16.979 ; v1(137.922,-11.373) 137.922,-11.539 138.468,-12.085 138.468,-19.17 139.434,-20.136 141.099,-20.136 LCD-MODULE.12
NetJ7_13: J7.13 LCD-MODULE.11 | length 29.4
  Top Layer, Top w0.254: v1(127.508,-18.796) 130.499,-18.796 v1(137.033,-12.262)
  Bottom Layer, Bottom w0.254: J7.13@121.143,-17.479 122.443,-17.479 125.175,-17.479 126.492,-18.796 v1(127.508,-18.796) ; v1(137.033,-12.262) 138.014,-13.243 138.014,-19.591 LCD-MODULE.11
NetJ7_14: J7.14 LCD-MODULE.3 | length 31.2
  Top Layer, Top w0.254: v1(117.221,-18.669) 123.952,-18.669 125.476,-20.193 130.931,-20.193 139.827,-11.297 LCD-MODULE.3
  Bottom Layer, Bottom w0.254: v1(117.221,-18.669) 117.482,-18.669 118.172,-17.979 J7.14@121.143,-17.979
NetJ7_15: J7.15 LCD-MODULE.4 | length 26.4
  Top Layer, Top w0.254: v1(127.508,-21.082) 130.865,-21.082 139.525,-12.421 141.19,-12.421 LCD-MODULE.4
  Bottom Layer, Bottom w0.254: J7.15@121.143,-18.479 122.443,-18.479 124.905,-18.479 v1(127.508,-21.082)
NetJ7_16: J7.16 LCD-MODULE.5 | length 31.1
  Top Layer, Top w0.254: v1(117.221,-19.812) 123.825,-19.812 125.857,-21.844 131.318,-21.844 139.378,-13.784 LCD-MODULE.5
  Bottom Layer, Bottom w0.254: v1(117.221,-19.812) 117.482,-19.812 118.315,-18.979 J7.16@121.143,-18.979
NetJ7_17: J7.17 LCD-MODULE.6 | length 26.2
  Top Layer, Top w0.254: v1(127.381,-22.606) 131.49,-22.606 138.983,-15.113 141.097,-15.113 LCD-MODULE.6@142.367,-13.843 ; LCD-MODULE.6 LCD-MODULE.6@142.367,-13.726
  Bottom Layer, Bottom w0.254: J7.17@121.143,-19.479 122.443,-19.479 124.254,-19.479 v1(127.381,-22.606)
NetJ7_18: J7.18 LCD-MODULE.7 | length 30.8
  Top Layer, Top w0.254: v1(117.221,-20.955) 123.825,-20.955 126.238,-23.368 132.461,-23.368 139.505,-16.324 LCD-MODULE.7
  Bottom Layer, Bottom w0.254: v1(117.221,-20.955) 117.482,-20.955 118.458,-19.979 J7.18@121.143,-19.979
NetJ7_19: J7.19 LCD-MODULE.8 | length 26
  Top Layer, Top w0.254: v1(127.381,-24.13) 132.506,-24.13 138.983,-17.653 141.097,-17.653 LCD-MODULE.8@142.367,-16.383 ; LCD-MODULE.8 LCD-MODULE.8@142.367,-16.266
  Bottom Layer, Bottom w0.254: J7.19@121.143,-20.479 122.443,-20.479 123.73,-20.479 v1(127.381,-24.13)
NetJ7_20: J7.20 LCD-MODULE.9 | length 32.4
  Top Layer, Top w0.254: v1(117.094,-22.098) 123.952,-22.098 126.746,-24.892 136.409,-24.892 137.725,-23.577 137.725,-20.967 LCD-MODULE.9
  Bottom Layer, Bottom w0.254: v1(117.094,-22.098) 117.602,-22.098 118.721,-20.979 J7.20@121.143,-20.979
NetJ7_21: J7.21 LCD-MODULE.10 | length 27.3
  Top Layer, Top w0.254: v1(127.508,-25.908) 136.035,-25.908 139.176,-22.767 140.752,-22.767 141.097,-22.422 141.097,-20.134 LCD-MODULE.10
  Bottom Layer, Bottom w0.254: J7.21@121.143,-21.479 122.571,-21.479 127,-25.908 v1(127.508,-25.908)
NetR1_2: R1.2 U2.7 | length 105.3
  Bottom Layer, Bottom w0.23: R1.2@9.781,-23.118 9.781,-23.948 11.811,-25.978 50.908,-25.978 58.166,-33.236 58.166,-55.315 61.81,-58.96 85.24,-58.96 85.44,-58.76 85.44,-57.685 U2.7
NetR2_2: R2.2 U2.8 | length 87.5
  Bottom Layer, Bottom w0.23: R2.2@24.981,-23.118 24.981,-23.781 26.67,-25.47 51.181,-25.47 53.267,-27.556 53.286,-27.556 58.674,-32.944 58.674,-55.189 61.925,-58.44 U2.8@84.4,-58.44
NetR3_1: R3.1 S1.1 S1.2 U1.8 | length 56.7
  Top Layer, Top w0.23: R3.1 5.2,-47.62 S1.1@5.4,-47.82
  Bottom Layer, Bottom w0.23: S1.1@5.4,-47.82 S1.2@11.9,-47.82
  Bottom Layer, Bottom w0.254: S1.2@11.9,-47.82 14.984,-44.736 51.981,-44.736 55.118,-41.599 U1.8
NetR4_1: R4.1 S2.1 S2.2 U1.7 | length 43.7
  Top Layer, Top w0.23: R4.1 14.75,-47.82 S2.1@17.4,-47.82
  Bottom Layer, Bottom w0.23: S2.1@17.4,-47.82 S2.2@23.9,-47.82
  Bottom Layer, Bottom w0.254: S2.2@23.9,-47.82 26.384,-45.336 52.524,-45.336 54.991,-42.869 U1.7
NetR5_1: R5.1 S3.1 S3.2 U1.6 | length 30.6
  Top Layer, Top w0.23: R5.1 29.35,-47.77 S3.1@29.4,-47.82
  Bottom Layer, Bottom w0.23: S3.1@29.4,-47.82 S3.2@35.9,-47.82
  Bottom Layer, Bottom w0.254: S3.2@35.9,-47.82 37.92,-45.8 53.585,-45.8 55.245,-44.139 U1.6
NetR6_1: R6.1 S4.1 S4.2 U1.5 | length 18.2
  Top Layer, Top w0.23: R6.1 41.35,-47.77 S4.1@41.4,-47.82
  Bottom Layer, Bottom w0.23: S4.1@41.4,-47.82 S4.2@47.9,-47.82
  Bottom Layer, Bottom w0.254: S4.2@47.9,-47.82 52.213,-47.82 54.624,-45.409 U1.5
NetR7_1: R7.1 S5.1 S5.2 U1.4 | length 69.5
  Top Layer, Top w0.23: S5.1@11.9,-65.32 11.9,-69.02 R7.1
  Bottom Layer, Bottom w0.23: S5.2@5.4,-65.32 11.9,-65.32 14.058,-63.163 14.058,-51.164 14.518,-50.704
  Bottom Layer, Bottom w0.254: 14.518,-50.704 15.24,-49.981 51.132,-49.981 54.434,-46.679 U1.4
NetR8_1: R8.1 S6.1 S6.2 U1.3 | length 56.1
  Top Layer, Top w0.23: R8.1 23.9,-69.02 S6.1@23.9,-65.32
  Bottom Layer, Bottom w0.23: S6.2@17.4,-65.32 S6.1@23.9,-65.32
  Bottom Layer, Bottom w0.254: S6.1@23.9,-65.32 26.22,-63 49.301,-63 50.4,-61.901 50.4,-51.426 53.876,-47.949 U1.3
NetR9_1: R9.1 S8.1 S8.2 U1.1 | length 32.4
  Top Layer, Top w0.23: R9.1 S8.1@47.9,-65.32
  Bottom Layer, Bottom w0.23: S8.2@41.4,-65.32 S8.1@47.9,-65.32
  Bottom Layer, Bottom w0.254: S8.1@47.9,-65.32 51.053,-65.32 51.935,-64.439 51.935,-51.48 52.926,-50.489 U1.1
NetR10_1: R10.1 S7.1 S7.2 U1.2 | length 43.5
  Top Layer, Top w0.23: R10.1 S7.1@35.9,-65.32
  Bottom Layer, Bottom w0.23: S7.2@29.4,-65.32 S7.1@35.9,-65.32
  Bottom Layer, Bottom w0.254: S7.1@35.9,-65.32 37.756,-63.464 49.536,-63.464 50.919,-62.081 50.919,-51.549 53.248,-49.219 U1.2
NetR11_1: R11.1 S9.1 S9.2 U2.6 | length 40.7
  Top Layer, Top w0.23: R11.1@51.506,-67.37 S9.1@53.392,-67.37 ; S9.1@53.35,-67.482 S9.1@53.392,-67.482
  Top Layer, Top w0.254: S9.1 S9.2
  Bottom Layer, Bottom w0.23: 63.835,-62.165 65.894,-60.106 85.694,-60.106 86.027,-59.773 86.8,-59 U2.6@86.8,-57.595 ; U2.6@86.8,-57.437 U2.6@86.8,-57.595 ; U2.6 U2.6@86.8,-57.595
  Bottom Layer, Bottom w0.254: S9.2 59.75,-66.25 63.835,-62.165
NetR12_1: R12.1 S10.1 S10.2 U2.5 | length 30.8
  Top Layer, Top w0.23: S10.1 S10.2
  Top Layer, Top w0.254: R12.1@62.452,-67.37 64.417,-67.37 S10.1@64.949,-66.838
  Bottom Layer, Bottom w0.23: S10.2 71.25,-64.984 74.8,-61.434 85.366,-61.434 88.1,-58.7 U2.5@88.1,-58.3
NetR13_1: R13.1 S11.1 S11.2 U2.4 | length 26.6
  Top Layer, Top w0.254: R13.1 75.75,-67.25 S11.1 S11.2
  Bottom Layer, Bottom w0.254: S11.1 80.2,-62.8 84.8,-62.8 89.468,-58.132 U2.4@89.468,-57.437
NetR14_1: R14.1 S12.1 S12.2 U2.3 | length 19.6
  Top Layer, Top w0.254: R14.1 87.25,-67.25 S12.1 S12.2
  Bottom Layer, Bottom w0.23: S12.1 90.6,-63.9 U2.3@90.6,-57.437
NetR15_1: R15.1 S13.1 S13.2 U2.2 | length 21.3
  Top Layer, Top w0.254: R15.1@97,-67.25 98.75,-67.25 S13.1 S13.2
  Bottom Layer, Bottom w0.23: U2.2@92,-57.437 92,-59.078 96.422,-63.5
  Bottom Layer, Bottom w0.254: 96.422,-63.5 99.25,-66.328 S13.1
NetR16_1: R16.1 S14.1 S14.2 U2.1 | length 31.6
  Top Layer, Top w0.254: R16.1 110.25,-67.25 S14.1 S14.2
  Bottom Layer, Bottom w0.23: U2.1@93.2,-57.437 93.2,-59.008 96.549,-62.357 103.459,-62.357 105.445,-64.343 105.905,-64.803 108.803,-64.803 S14.1@109.8,-65.8
  Bottom Layer, Bottom w0.254: S14.1@109.8,-65.8 S14.1
NetR29_1: R29.1 S23.1 S23.2 U3.1 | length 87.9
  Top Layer, Top w0.23: v1(128.8,-52.2) 131.994,-52.2 132.594,-51.6 v1(132.6,-51.6) ; R29.1 S23.1@148.55,-4.45 ; S23.1 S23.2
  Bottom Layer, Bottom w0.23: U3.1 115.445,-56.8 115.645,-56.6 120,-56.6 124.4,-52.2 v1(128.8,-52.2) ; v1(132.6,-51.6) 136.4,-47.8 136.4,-43 139.051,-40.349 142.85,-40.349 145.281,-37.918 145.281,-28.919 151.8,-22.4 151.8,-7.3 S23.1
NetR30_1: R30.1 S22.1 S22.2 U3.2 | length 94.9
  Top Layer, Top w0.23: v1(128.8,-53.6) 131.987,-53.6 132.387,-53.2 v1(132.6,-53.2) ; R30.1 160.05,-4.45 S22.1 S22.2
  Bottom Layer, Bottom w0.23: U3.2 114.175,-58.657 114.817,-59.3 116.1,-59.3 118.2,-57.2 120.4,-57.2 124,-53.6 v1(128.8,-53.6) ; v1(132.6,-53.2) 137.2,-48.6 137.2,-44.6 138.8,-43 144,-43 145.6,-41.4 145.6,-29.4 157.8,-17.2 157.8,-6.7 S22.1
NetR31_1: R31.1 S21.1 S21.2 U3.3 | length 103.8
  Top Layer, Top w0.23: v1(128.8,-55) 131.987,-55 132.387,-54.6 v1(132.6,-54.6) ; R31.1 S21.1@171.55,-4.45 ; S21.1 S21.2
  Bottom Layer, Bottom w0.23: U3.3 112.905,-58.2 114.4,-59.695 116.905,-59.695 119.081,-57.519 120.881,-57.519 123.4,-55 v1(128.8,-55) ; v1(132.6,-54.6) 137.8,-49.4 137.8,-46 138.2,-45.6 144.8,-45.6 146,-44.4 146,-30 165,-11 166.2,-11 167.4,-11 169.4,-9 169.4,-6.6 S21.1
NetR32_1: R32.1 S20.1 S20.2 U3.4 | length 72.7
  Top Layer, Top w0.23: R32.1 167.75,-67.25 S20.1@168.049,-66.951
  Bottom Layer, Bottom w0.23: U3.4 111.635,-60.235 113.8,-62.4 156,-62.4 162.555,-68.955 166.045,-68.955 S20.1
  Bottom Layer, Bottom w0.381: S20.1 S20.2
NetR33_1: R33.1 S19.1 S19.2 U3.5 | length 60.6
  Top Layer, Top w0.23: R33.1 156.25,-67.25 S19.1 S19.2
  Bottom Layer, Bottom w0.23: U3.5 110.365,-59.765 113.4,-62.8 152.8,-62.8 S19.1
NetR34_1: R34.1 S18.1 S18.2 U3.6 | length 50.4
  Top Layer, Top w0.23: R34.1 144.75,-67.25 S18.1 S18.2
  Bottom Layer, Bottom w0.23: U3.6 109.095,-59.695 112.6,-63.2 141.7,-63.2 S18.1
NetR35_1: R35.1 S17.1 S17.2 U3.7 | length 39.7
  Top Layer, Top w0.23: R35.1 133.25,-67.25 S17.1 S17.2
  Bottom Layer, Bottom w0.23: U3.7 107.825,-59.025 112.4,-63.6 130.6,-63.6 S17.1
NetR36_1: R36.1 S16.1 S16.2 U3.8 | length 29.3
  Top Layer, Top w0.23: R36.1 121.75,-67.25 S16.1 S16.2
  Bottom Layer, Bottom w0.23: U3.8 106.555,-58.555 112,-64 119.5,-64 S16.1
SD_CS: J7.34 R25.2 | length 77
  Top Layer, Top w0.254: v1(118.237,-28.067) 123.317,-28.067 126.492,-31.242 126.492,-59.633 130.659,-63.8 v1(159.2,-63.8)
  Bottom Layer, Bottom w0.254: v1(118.237,-28.067) 118.325,-27.979 J7.34@121.143,-27.979 ; v1(159.2,-63.8) 160.77,-63.8 R25.2
VCC12_IN: ACCUM.2 Q1.3 R26.2 R27.2 T1.LCP | length 19.2
  Bottom Layer, Bottom w0.381: R27.2 R26.2 41.733,-14.516 41.733,-9.842 T1.LCP@41.901,-9.673 ; Q1.3@46.101,-9.673 46.711,-10.283 Q1.3 Q1.3@46.552,-9.673
  Bottom Layer, Bottom w2: T1.LCP@41.901,-9.673 Q1.3@46.101,-9.673 ; ACCUM.2 Q1.3@46.101,-9.673 ; Q1.3@46.552,-9.673 Q1.3@46.101,-9.673
pads on no net: ENC2.6 ENC2.7 ESP-8266.2 ESP-8266.3 ESP-8266.7 IN_2.4 J2.1 J2.8 LCD-MODULE.23 LCD-MODULE.24 LCD-MODULE.25 LCD-MODULE.27 LCD-MODULE.28 LCD-MODULE.29 LCD-MODULE.30 LCD-MODULE.31 LCD-MODULE.32 LCD-MODULE.33 LCD-MODULE.34 LCD-MODULE.37 R1.4 R1.5 R2.4 R2.5
copper on no net:
  other v2: 55.321,-55.567 141.221,-55.567 55.321,-5.148 141.221,-5.148

## Polygon pours and split planes (outlines as drawn)
GND on Top Layer, Top "Top Layer, Top-GND" (solid, remove dead copper, pour order 0): 0.66,-0.73 186.34,-0.73 186.34,-76.41 0.66,-76.41
GND on Bottom Layer, Bottom "Bottom Layer, Bottom-GND" (solid, remove dead copper, pour order 2): 0.66,-0.73 186.34,-0.73 186.34,-76.41 0.66,-76.41

## Keep-outs
Keep-Out Layer, Board:
  lines w0.127: 0,-77.07 0,-0.07 187,-0.07 187,-77.07 0,-77.07
  lines w0.14: 0,-77.07 187,-77.07 187,-0.07 0,-0.07 0,-77.07

## Silkscreen, mask and mechanical layers (free items; w line width, h text height)
Top Overlay, Top Silk: